# Altium PCB JacdacModuleTesterEc30 91.PcbDoc (part 2 of 2)
Units mm, origin at the board's own origin, x right, y up, seen from the top; angles counter-clockwise.
Board outline 25 x 48 mm, 2 copper layers (Top Layer, Bottom Layer), stack 1.525 mm thick; 43 components, 32 nets, 150 pads, 34 vias.
Unrouted connection lines stored in the file: 18.
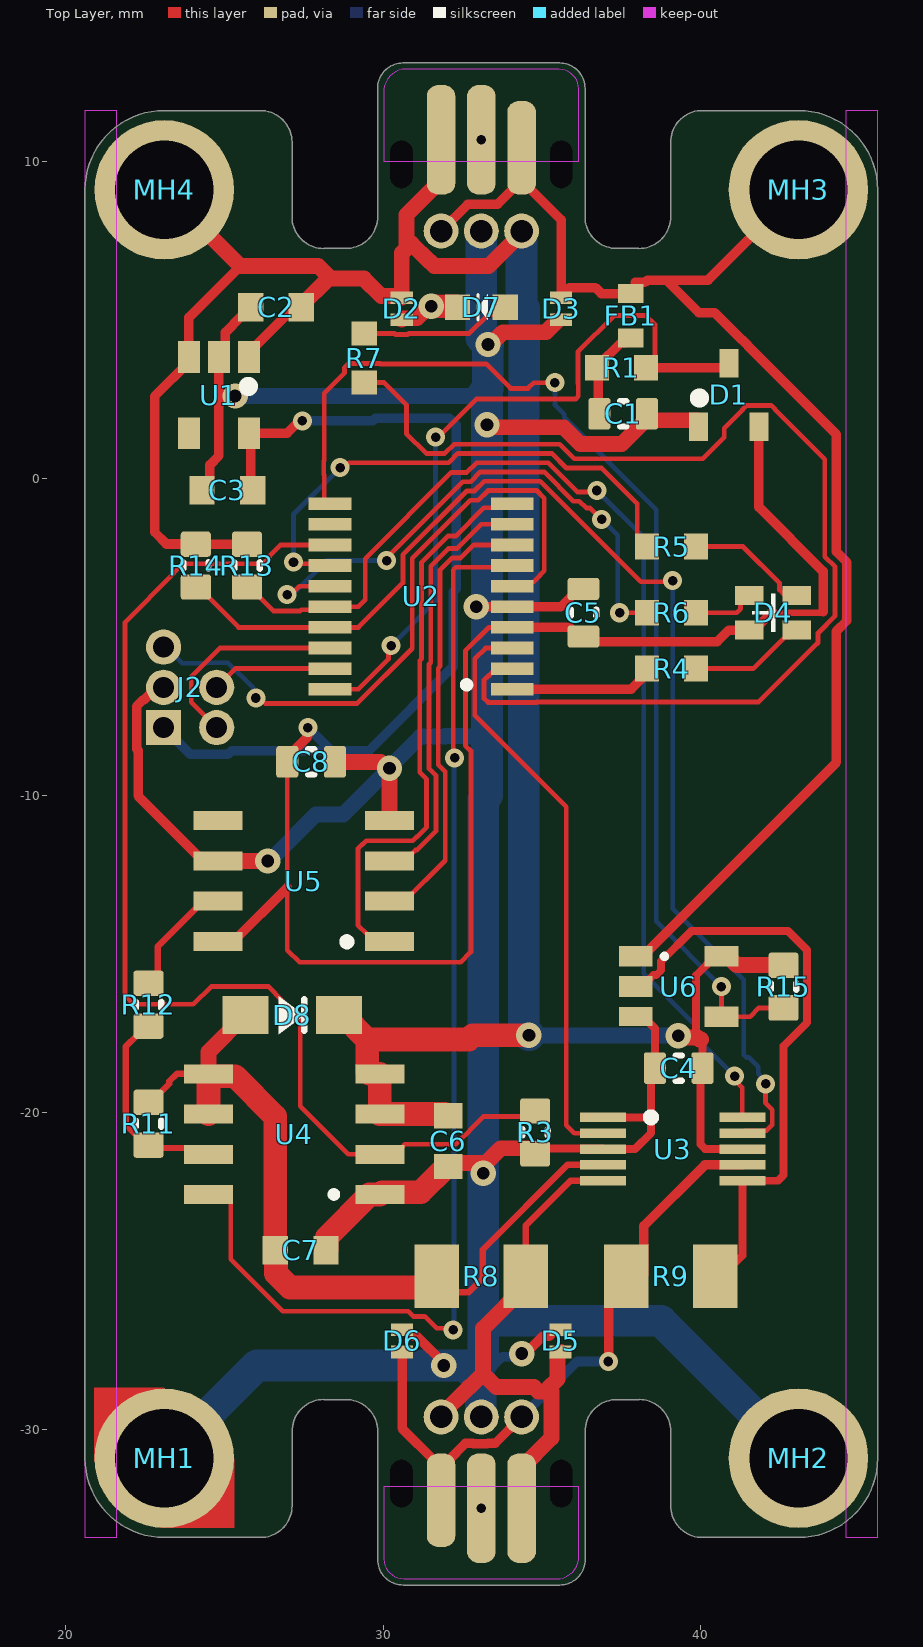
[diagram p0: Top Layer view]

## Silkscreen, mask and mechanical layers (free items; w line width, h text height) (continued)
Board Outline: (continued)
  lines w0.2: 20.6,9.092 20.6,-30.9 ccw(c23.1,-30.9) 23.1,-33.4 ; 20.6,9.1 cw(c23.1,9.1) 23.1,11.6 26.13,11.6 cw(c26.13,10.6) 27.13,10.6 27.13,8.248 ccw(c28.13,8.248) 28.13,7.248 ; 23.104,-33.4 26.134,-33.4 ccw(c26.133,-32.4) 27.133,-32.4 ; 27.133,-30.048 cw(c28.133,-30.048) 28.133,-29.048 ; 27.134,-32.4 27.134,-30.048 ; 28.13,7.25 28.86,7.25 ; 28.134,-29.05 28.834,-29.05 cw(c28.833,-30.05) 29.833,-30.05 ; 28.83,7.25 ccw(c28.83,8.25) 29.83,8.25 ; 29.83,8.248 29.83,12.298 ; 29.83,12.3 cw(c30.63,12.3) 30.63,13.1 35.57,13.1 cw(c35.57,12.3) 36.37,12.3 36.37,8.25 ccw(c37.37,8.25) 37.37,7.25 38.07,7.25 ; 29.833,-34.1 ccw(c30.633,-34.1) 30.633,-34.9 ; 29.834,-34.1 29.834,-30.05 ; 30.634,-34.9 35.574,-34.9 ccw(c35.573,-34.1) 36.373,-34.1 ; 36.374,-34.098 36.374,-30.048 ; 36.373,-30.05 cw(c37.373,-30.05) 37.373,-29.05 ; 37.344,-29.05 38.074,-29.05 ; 38.07,7.248 ccw(c38.07,8.248) 39.07,8.248 39.07,10.6 cw(c40.07,10.6) 40.07,11.6 43.1,11.6 cw(c43.1,9.1) 45.6,9.1 45.6,-30.9 cw(c43.1,-30.9) 43.1,-33.4 ; 38.073,-29.048 cw(c38.073,-30.048) 39.073,-30.048 39.074,-32.4 ccw(c40.073,-32.4) 40.073,-33.4 ; 40.074,-33.4 43.104,-33.4
  text "Board Outline" at 50.352,26.514 h1.7
Top Assy:
  circle w0.254: c28.8,-14.605 r0.111
  circle w0.254: c38.422,-20.15 r0.111
  text "Top Assy" at 50.35,25.2 h1.7
Bottom Assy:
  text "Bottom Assy" at 50.352,23.8 h1.7

## Dimensions
27.13,9.248 to 29.83,9.248 on Dimension
29.83,13.298 to 36.37,13.3 on Dimension

## Text inside footprints (layer, text, board x,y; h text height)
J1: Mechanical 9 "Jacdac / cable connector  / body" at 37.921,17.258 h1.7
J3: Mechanical 9 "Jacdac / cable connector  / body" at 28.279,-39.058 h1.7 r180